# EAGLE board embedded_weighing_machine (EAGLE 9.7.0)

Size 199.65 x 141.04 mm. Coordinates in mm from the lower left corner, seen from the top.
Outline: 0,0 199.65,0 199.65,141.04 0,141.04 0,0
Copper layers (1*16): Top 0.035mm / dielectric 1.5mm / Bottom 0.035mm
Design rules "default": minimum track width 6mil, minimum drill 0.35mm, track to track 6mil, track to pad 6mil, pad to pad 6mil, via to via 6mil, smd to smd 6mil, copper to edge 40mil, drill to drill 6mil, minimum pad ring 10mil, minimum via ring 8mil, stop-mask expansion 4mil, vias tented up to drill 0mil, thermal gap 10mil

## Footprints (pad centres in the part's own frame; a part is rotated, then mirrored left to right if it is on the bottom)
1X02 = drill 1.016 long: 1 -1.27,0; 2 1.27,0
RESAD1016W63L850D250B = drill 0.83 pad 1.43: 1 -5.08,0; 2 5.08,0
ARDUINO-UNO-R3-SHIELD = drill 1.016 pad 1.88: 3.3V 24.13,-2.54; 5V 24.13,0; A0 24.13,12.7; A1 24.13,15.24; A2 24.13,17.78; A3 24.13,20.32; A4 24.13,22.86; A5 24.13,25.4; AREF -24.13,-13.97; D2 -24.13,20.32; D3 -24.13,17.78; D4 -24.13,15.24; D5 -24.13,12.7; D6 -24.13,10.16; D7 -24.13,7.62; D8 -24.13,3.81; D9 -24.13,1.27; D10 -24.13,-1.27; D11 -24.13,-3.81; D12 -24.13,-6.35; D13 -24.13,-8.89; GND@0 24.13,2.54; GND@1 24.13,5.08; GND@2 -24.13,-11.43; IOREF 24.13,-7.62; NC 24.13,-10.16; RES 24.13,-5.08; RX -24.13,25.4; SCL -24.13,-19.05; SDA -24.13,-16.51; TX -24.13,22.86; VIN 24.13,7.62
LCD-I2C = drill 1.016 long: 1 -19.05,-5.08; 2 -19.05,-7.62; 3 -19.05,-10.16; 4 -19.05,-12.7

## Placement (x,y rotation side)
R1  FORCE-SENSOR  [1X02]  63.01,98.08 0 top
R2  FORCE-SENSOR  [1X02]  83.33,98.08 0 top
R3  FORCE-SENSOR  [1X02]  42.69,98.08 0 top
R4  FORCE-SENSOR  [1X02]  22.37,98.08 0 top
R5  10k  [RESAD1016W63L850D250B]  84.6,87.92 90 top
R6  10k  [RESAD1016W63L850D250B]  64.28,87.92 90 top
R7  10k  [RESAD1016W63L850D250B]  43.96,87.92 90 top
R8  10k  [RESAD1016W63L850D250B]  23.64,87.92 90 top
U1  ARDUINO-UNO-R3-SHIELD  [ARDUINO-UNO-R3-SHIELD]  47.88,29.84 270 top
U6  LCD-16X2-I2CSUNFOUNDER-IIC  [LCD-I2C]  144.03,133.5 0 top

## Library data of the parts
R1-R8 U1 U6 = Tinkercad

## Nets
U1_5V: R1.1 R2.1 R3.1 R4.1 U1.5V U6.2
U1_A2: R4.2 R8.2 U1.A2
U1_A3: R3.2 R7.2 U1.A3
U1_A4: R1.2 R6.2 U1.A4
U1_A5: R2.2 R5.2 U1.A5
U1_GND: R5.1 R6.1 R7.1 R8.1 U1.GND@0 U1.GND@1 U1.GND@2 U6.1
U1_SCL: U1.SCL U6.4
U1_SDA: U1.SDA U6.3

## Tracks (layer width: path | path; a pad name or v marks a point on that pad's centre or on a via)
U1_5V  (5 unrouted)
U1_A2  (2 unrouted)
U1_A3  (2 unrouted)
U1_A4  (2 unrouted)
U1_A5  (2 unrouted)
U1_GND  (7 unrouted)
U1_SCL  (1 unrouted)
U1_SDA  (1 unrouted)